# Altium PCB Radio_Unit.PcbDoc
Units mm, origin at the board's own origin, x right, y up, seen from the top; angles counter-clockwise.
Board outline 32 x 45 mm, 2 copper layers (Top Layer, Bottom Layer); 26 components, 20 nets, 90 pads, 29 vias.
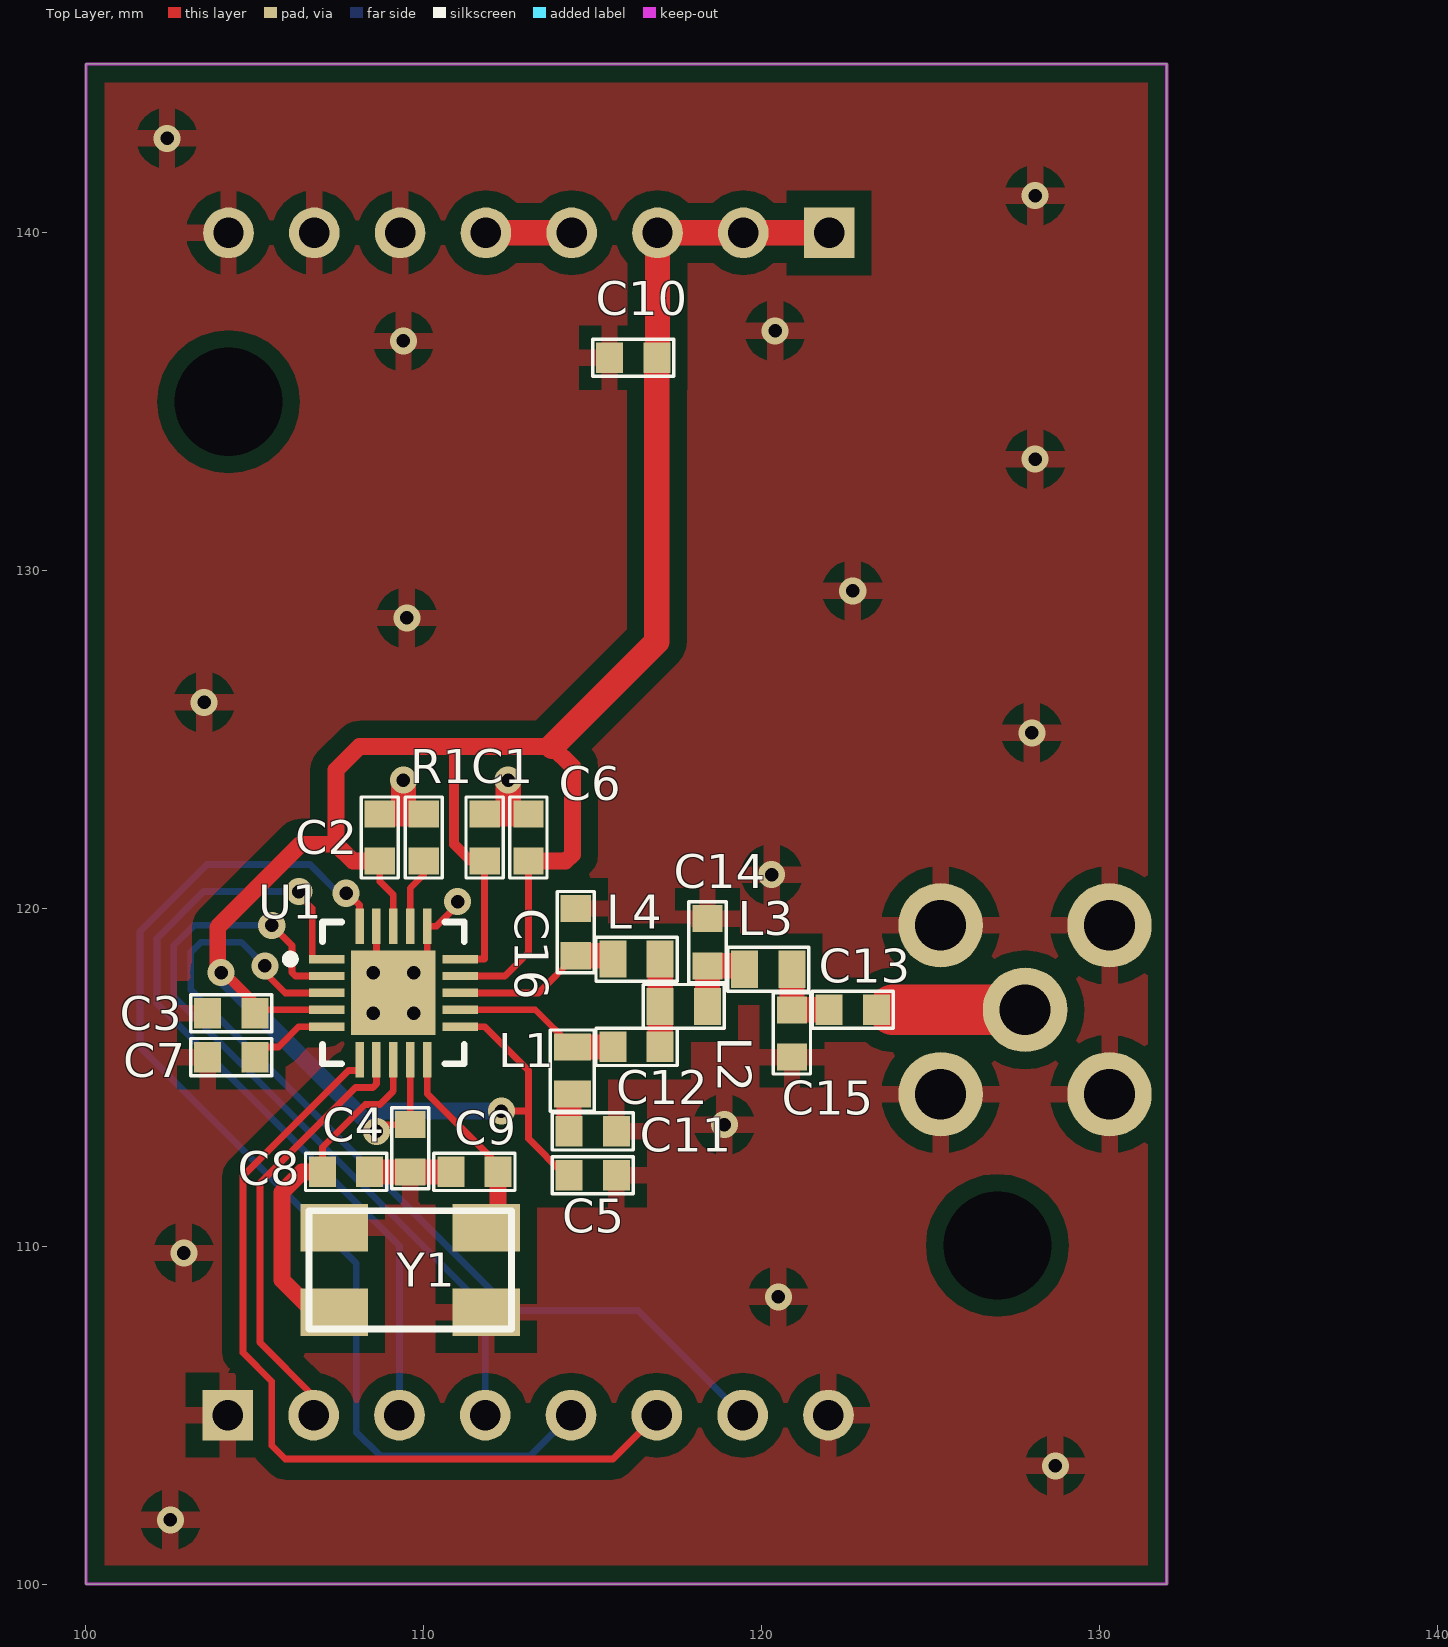
[diagram p0: Top Layer view]
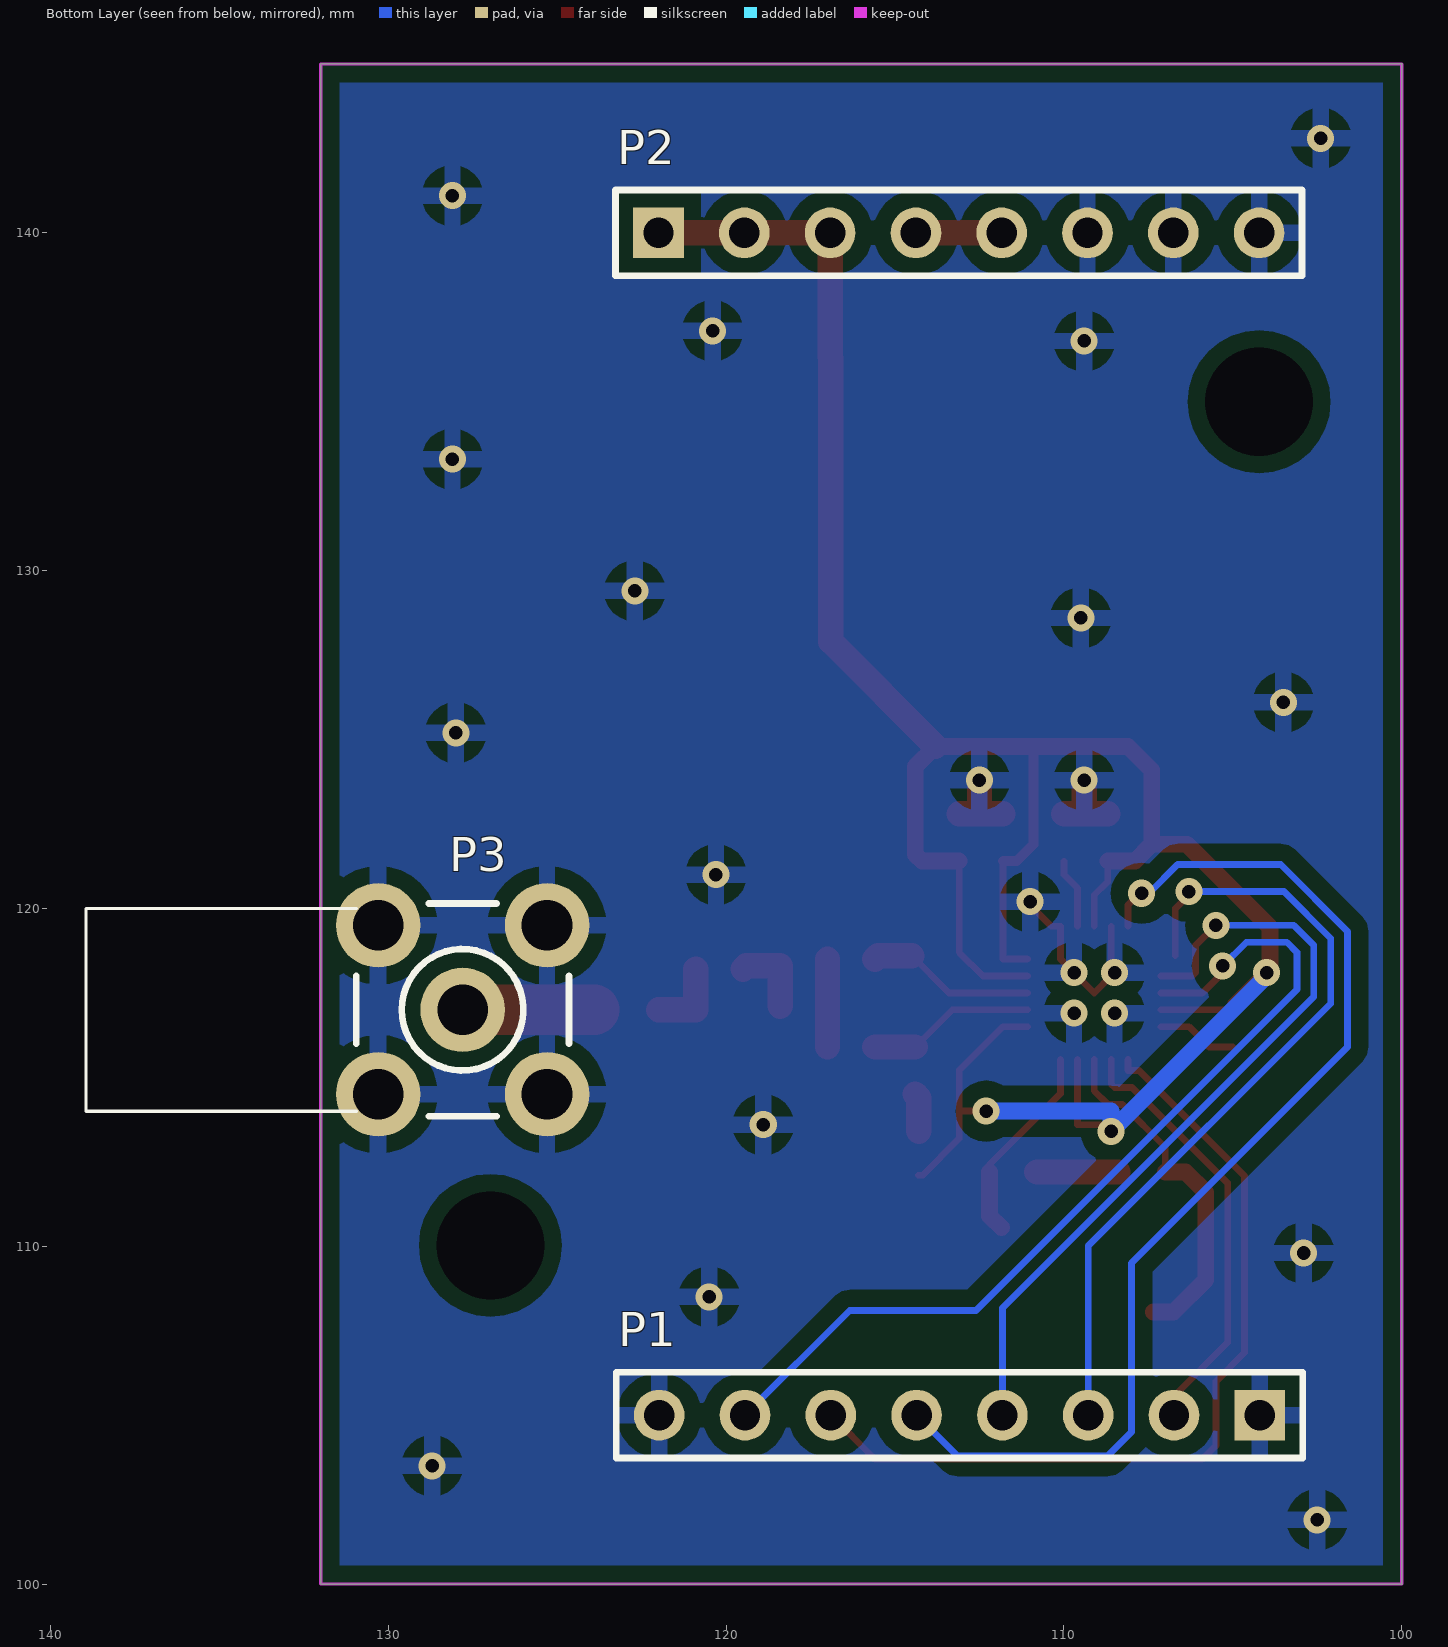
[diagram p1: Bottom Layer view, seen from below]

## Layer stack, top to bottom
Top Layer: signal copper 0.0356
Dielectric: dielectric 0.32, FR-4, Dk 4.8
Bottom Layer: signal copper 0.0356

## Board outline
100,100 100,145 132,145 132,100 100,100

## Design rules (kind name [scope] priority, off if disabled: settings)
Clearance "Clearance_GND_VCC +3.3" [InNet('GND') vs InNet('VCC +3.3')] p1 off: gap=0.2
Clearance Clearance_U3_Trace [(IsTrack  And IsNet)  And InRegion(3815,3770 ,4275 ,4280) vs (IsTrack  And IsNet)  And InRegion(3815,3770 ,4275 ,4280)] p2: gap=0.2
Clearance Clearance_QFP_NET [InNet('SPI_MISO/DO','SPI_MOSI/DI','GND','VCC','GDO2','GDO0','SPI_SS','SPI_SCK','NetC3_1','NetC2_1','GND','NetC1_2','NetANT1_1','NetR1_2')  And InRegion(3815,3770 ,4275 ,4280) vs InNet('SPI_MISO','SPI_MOSI','GND','VCC','GDO2','GDO0','SPI_SS','SPI_SCK','NetC3_1','NetC2_1','GND')  And InRegion(3815,3770 ,4275 ,4280)] p3: gap=0.2
Clearance Clearance_QFP_Pins [InComponent('U1') And IsPad] p4: gap=0.2
Clearance Clearance_GND [InPolygon] p5: gap=0.5
Clearance [All] p6: gap=0.3
ComponentClearance ComponentClearance_R1_C10 [InComponent('C10') vs InComponent('R1')] p1 off: gap=0 collisioncheckmode=3 verticalgap=0 showdistances=FALSE
ComponentClearance [All] p2 off: gap=0.3 collisioncheckmode=3 verticalgap=0.3 showdistances=FALSE
HoleSize [All] p1: absolutevalues=TRUE maxlimit=5 minlimit=0.3 maxpercent=80.000 minpercent=20.000
NetAntennae [All] p1: netantennaetolerance=50
PlaneConnect [All] p1: planeconnectstyle=Relief reliefexpansion=0.508 reliefentries=4 reliefconductorwidth=0.3 reliefairgap=0.3
PolygonConnect [All] p1: connectstyle=Relief reliefconductorwidth=0.5 reliefentries=4 polygonreliefangle="90 Angle"
RoutingCorners [All] p1: cornerstyle=45-Degree minsetback=2.54 maxsetback=5
RoutingVias [All] p1: holewidth=0.5 width=1.6 viastyle="Through Hole" minholewidth=0.3 minwidth=0.6 maxholewidth=1 maxwidth=2
ShortCircuit ShortCircuit_ANT1 [InComponent('ANT1')] p1: allowed=TRUE
ShortCircuit [All] p2: allowed=FALSE
SilkToSilkClearance [All] p1: silktosilkclearance=0.3
SilkscreenOverComponentPads [All] p1: minsilkscreentomaskgap=0.254
SolderMaskExpansion [All] p1: expansion=0.102
Width [All] p1: maxlimit=5 minlimit=0.2 preferedwidth=0.3
20 further rules are at their usual default settings.

## Components (designator, comment, footprint, x,y, rotation, side; value= is the part's Value field where it differs from the comment)
C1 "0805" C0603 111.8,122.1 r270 top
C2 "0805" C0603 108.7,122.1 r270 top
C3 "0805" C0603 104.3,116.9 r0 top
C4 "0805" C0603 109.6,112.9 r90 top
C5 "0805" C0603 115,112.1 r180 top
C6 "0805" C0603 113.1,122.1 r270 top
C7 "0805" C0603 104.3,115.6 r180 top
C8 "0805" C0603 107.7,112.2 r0 top
C9 "0805" C0603 111.5,112.2 r180 top
C10 "0805" C0603 116.2,136.3 r180 top
C11 "0805" C0603 115,113.4 r0 top
C12 "0805" C0603 116.3,115.9 r180 top
C13 "0805" C0603 122.7,117 r0 top
C14 "0805" C0603 118.4,119 r270 top
C15 "0805" C0603 120.9,116.3 r90 top
C16 "0805" C0603 114.5,119.3 r270 top
L1 "SMD" L0603 114.4,115.2 r270 top
L2 "SMD" L0603 117.7,117.1 r0 top
L3 "SMD" L0603 120.2,118.2 r0 top
L4 "SMD" L0603 116.3,118.5 r0 top
P1 "Header 8" HDR1X8 104.2,105 r0 bottom locked
P2 "Header 8" HDR1X8 122,140 r180 bottom locked
P3 "SMA" SMA 127.8,117 r0 bottom locked
R1 "RES" C0603 110,122.1 r270 top
U1 "CC1101" VQFN20 109.1,117.5 r0 top
Y1 "SMD" Quartz_SMD0603 109.6,109.3 r0 top

## Footprints (in the part's own frame and the unit in brackets; to place one, negate y for a bottom-side part, rotate by r counter-clockwise, add the part's x,y. Pads: shape width x height; smd on the part's side, far side on the other; paste and mask are expansions set on the pad)
C0603 [mm]
  rect 0.8x0.9 smd: 1(-0.7,0) 2(0.7,0)
  silkscreen extent -1.2,-0.55 1.2,0.55, body extent -0.87,-0.48 0.87,0.48, height 1.3
HDR1X8 [mm] "Connector; Header; 8 Position"
  rect 1.5x1.5 hole 0.9: 1(0,0)
  round 1.5 hole 0.9: 2(2.54,0) 3(5.08,0) 4(7.62,0) 5(10.16,0) 6(12.7,0) 7(15.24,0) 8(17.78,0)
  silkscreen extent -1.27,-1.27 19.05,1.27
L0603 [mm] "SMD_inductor 0603"
  rect 0.8x1.1 smd: 1(-0.7,0) 2(0.7,0)
  silkscreen extent -1.2,-0.65 1.2,0.65, body extent -0.87,-0.48 0.87,0.48, height 1.3
Quartz_SMD0603 [mm]
  rect 2x1.4 smd: 1(-2.25,-1.25) 2(2.25,-1.25) 3(2.25,1.25) 4(-2.25,1.25)
  silkscreen extent -3,-1.75 3,1.75
SMA [mm]
  round 2.5 hole 1.5: 1(0,0) 2(-2.5,-2.5) 2(-2.5,2.5) 2(2.5,-2.5) 2(2.5,2.5)
  silkscreen extent -3.15,-3.15 11.15,3.15
VQFN20 [mm] "QFN, 20-Leads, Body 4,2x4,2mm (max), Pitch 0,50mm, IPC Low Density"
  rect 1.05x0.25 smd: 1(-1.975,1) 2(-1.975,0.5) 3(-1.975,0) 4(-1.975,-0.5) 5(-1.975,-1) 11(1.975,-1) 12(1.975,-0.5) 13(1.975,0) 14(1.975,0.5) 15(1.975,1)
  rect 0.25x1.05 smd: 6(-1,-1.975) 7(-0.5,-1.975) 8(0,-1.975) 9(0.5,-1.975) 10(1,-1.975) 16(1,1.975) 17(0.5,1.975) 18(0,1.975) 19(-0.5,1.975) 20(-1,1.975)
  rect 2.5x2.5 smd: 21(0,0)
  silkscreen extent -3.17,-2.1 2.1,2.1, body extent -2.07,-2.07 2.07,2.07, height 0.8

## Part data
C1 C2 C3 C4 C5 C6 C7 C8 C9 C10 C11 C12 C13 C14 C15 C16: library part Capasitor_SMD_0805, "Capasitor_SMD_0808/"
L1 L2 L3 L4: library part Induktor_SMD
P1 P2: "Header, 8-Pin"
R1: "Resistor"
Y1: library part Quartz_SMD

## Free pads (board coordinates)
  round 0 hole 3.2: 0(126.98,110.025) 1(104.22,135)

## Via types
v1: diameter 0.8, hole 0.4, Top Layer to Bottom Layer, tented both sides, 25 vias
v2: diameter 0.8, hole 0.4, Top Layer to Bottom Layer, tented bottom, 4 vias

## Nets (pads, with @x,y where several pads share a name; then routed paths per layer and width w, separated by ;. In a path a pad name is that pad's centre, name@x,y a point inside that pad or via, vN(x,y) a via of type N, cw(c..) or ccw(c..) an arc to the next point about the centre after c; other vN are vias at no path point)
GND: C1.1 C2.1 C3.1 C4.1 C5.1 C6.1 C7.2 C8.2 C9.2 C10.2 C11.2 C14.1 C15.1 C16.1 P1.1 P1.8 P2.6 P2.7 P2.8 P3.2 R1.1 U1.16 U1.19 U1.21 Y1.2 Y1.4 | length 12.8
  Top Layer w0.2: U1.19 108.6,118 U1.21 110.1,118.5 U1.16 110.375,119.475 111,120.1 v1(111,120.2)
  Top Layer w0.75: C8.2 C4.1 C9.2 ; C2.1 109.4,122.8 ; v1(109.4,123.8) 109.4,122.8 ; R1.1 109.4,122.8 ; C1.1 112.5,122.8 ; v1(112.5,123.8) 112.5,122.8 ; C6.1 112.5,122.8
  other v1: 102.5,101.9 128.7,103.5 120.5,108.5 102.9,109.8 118.9,113.6 120.3,121 128,125.2 103.5,126.1 109.5,128.6 122.7,129.4 128.1,133.3 109.4,136.8 120.4,137.1 128.1,141.1 102.4,142.8
  other v2: 108.5,116.9 109.7,116.9 108.5,118.1 109.7,118.1
NetC7_1: C7.1 U1.5 | length 2.4
  Top Layer w0.2: C7.1@105,115.9 105.7,115.9 106.3,116.5 U1.5
NetC8_1: C8.1 U1.8 Y1.1 | length 10.4
  Top Layer w0.2: C8.1 107,112.931 108.268,114.2 108.7,114.2 109.1,114.6 U1.8
  Top Layer w0.5: C8.1 106.4,112.2 105.8,111.6 105.8,109 106.75,108.05 Y1.1
NetC9_1: C9.1 U1.10 Y1.3 | length 6
  Top Layer w0.2: U1.10 110.1,114.516 112.2,112.416 C9.1
  Top Layer w0.5: Y1.3 112.2,110.9 C9.1
NetC11_1: C11.1 L1.2 | length 1.1
  Top Layer w0.75: C11.1 114.3,114.4 L1.2
NetC12_1: C12.1 L2.1 L4.2 | length 2.6
  Top Layer w0.75: C12.1 L2.1 L4.2
NetC12_2: C12.2 L1.1 U1.12 | length 5
  Top Layer w0.2: U1.12 113.3,117 L1.1
  Top Layer w0.75: L1.1 C12.2
NetC13_1: C13.1 C15.2 L3.2 | length 2.3
  Top Layer w0.75: L3.2 C15.2 C13.1
NetC13_2: C13.2 P3.1 | length 3.9
  Top Layer w1.5: 123.9,117 P3.1
NetC14_2: C14.2 L2.2 L3.1 | length 2.3
  Top Layer w0.75: L2.2 C14.2 119.4,118.3 L3.1
NetC16_2: C16.2 L4.1 U1.13 | length 5
  Top Layer w0.2: U1.13 113.4,117.5 C16.2
  Top Layer w0.75: C16.2 115.5,118.6 L4.1
NetP2_4: P2.4 P2.5 | length 2.5
  Top Layer w0.75: P2.5 P2.4
NetR1_2: R1.2 U1.17 | length 2.1
  Top Layer w0.2: U1.17 109.6,120.6 110,121 R1.2
SPI_MISO: P1.4 U1.2 | length 23.8
  Top Layer w0.2: v1(105.5,119.5) 106.1,118.9 106.1,118.1 106.2,118 U1.2
  Bottom Layer w0.2: v1@105.5,119.3 v1(105.5,119.5) 103.193,119.5 102.6,118.907 102.6,117.393 111.82,108.173 P1.4
SPI_MOSI: P1.5 U1.20 | length 33.1
  Top Layer w0.2: v1(107.7,120.45) 107.75,120.45 108.1,120.1 U1.20
  Bottom Layer w0.2: v1(107.7,120.45) 107.481,120.45 106.631,121.3 103.579,121.3 101.6,119.321 101.6,115.9 108,109.5 108,104.5 108.7,103.8 113.16,103.8 P1.5
SPI_SCK: P1.3 U1.1 | length 23.9
  Top Layer w0.2: v1(106.3,120.5) 106.3,120.4 106.7,120 U1.1@106.7,118.6
  Bottom Layer w0.2: v1(106.3,120.5) 103.486,120.5 102.1,119.114 102.1,117.186 109.28,110.006 P1.3
SPI_SS: P1.2 U1.7 | length 12.9
  Top Layer w0.2: P1.2 106.74,105.56 105.15,107.15 105.15,111.869 107.981,114.7 108.493,114.7 108.6,114.807 U1.7
TR_GP1: P1.6 U1.6 | length 25.5
  Top Layer w0.2: U1.6 108.1,115.2 107.773,115.2 104.65,112.076 104.65,106.85 105.5,106 105.5,104.1 105.9,103.7 115.6,103.7 P1.6
TR_GP2: P1.7 U1.3 | length 27.8
  Top Layer w0.2: v1(105.3,118.3) 105.1,118.3 105.9,117.5 U1.3
  Bottom Layer w0.2: v1(105.3,118.3) 104.6,119 103.4,119 103.1,118.7 103.1,117.6 112.6,108.1 116.34,108.1 P1.7
VCC: C1.2 C2.2 C3.2 C4.2 C5.2 C6.2 C10.1 P2.1 P2.2 P2.3 U1.4 U1.9 U1.11 U1.14 U1.15 U1.18 | length 82.3
  Top Layer w0.2: C3.2@105,117.2 105.2,117 U1.4 ; v1(108.6,113.4) 108.8,113.6 C4.2 U1.9 ; C2.2 108.7,120.8 109.1,120.4 U1.18 ; U1.11 111.8,116.5 113.1,115.2 113.1,114 ; U1.14 112.4,118 113.1,118.7 C6.2 ; U1.15 111.8,118.5 C1.2 ; v1(112.3,114) 113.1,114 ; C5.2 114.184,112.1 113.1,113.184 113.1,114
  Top Layer w0.3: v1(104,118.1) 104.098,118.1 105,117.198 C3.2 ; 110.9,124.8 110.9,121.9 111.4,121.4 C1.2
  Top Layer w0.5: v1(104,118.1) 103.9,118.2 103.9,119.444 106.356,121.9 107.4,121.9 ; C2.2 107.9,121.4 107.4,121.9 ; C6.2 114.2,121.4 114.4,121.6 114.4,124.2 113.8,124.8 110.9,124.8 108.1,124.8 107.4,124.1 107.4,121.9
  Top Layer w0.75: 113.8,124.8 116.9,127.9 C10.1 116.92,136.32 P2.3 P2.2 P2.1
  Bottom Layer w0.5: v1(104,118.1) 104,118 v1(108.6,113.4) 108.6,114 v1(112.3,114)

## Polygon pours and split planes (outlines as drawn)
GND on Top Layer "Bottom Layer-No Net" (solid, remove dead copper, pour order 2): 100,145 132,145 132,100 100,100
GND on Bottom Layer "Bottom Layer-No Net" (solid, remove dead copper, pour order 4): 100,145 132,145 132,100 100,100

## Keep-outs
Keep-Out Layer:
  the board outline again, w0.1

## Silkscreen, mask and mechanical layers (free items; w line width, h text height)
Mechanical 1:
  the board outline again, w0.1